# Altium PCB DE-120824.PcbDoc (part 1 of 2)
Units mil, origin at the board's own origin, x right, y up, seen from the top; angles counter-clockwise.
Board outline 2677.17 x 5787.4 mil, 4 copper layers (Top Layer, GND, PWR, Bottom Layer), stack 30.634 mil thick; 144 components, 186 nets, 562 pads, 68 vias.
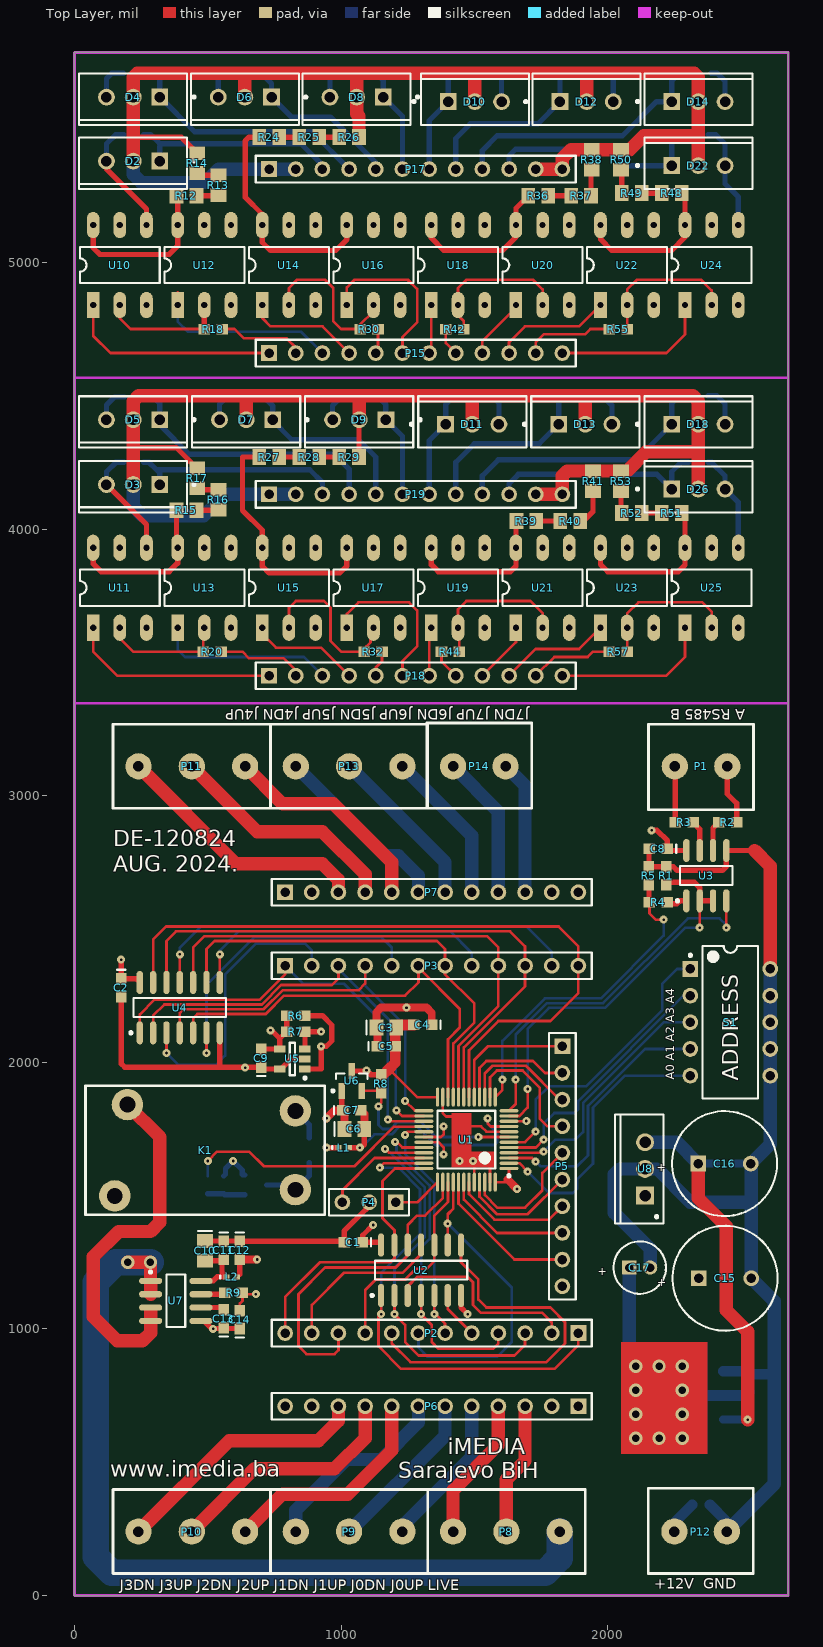
[diagram p0: Top Layer view]
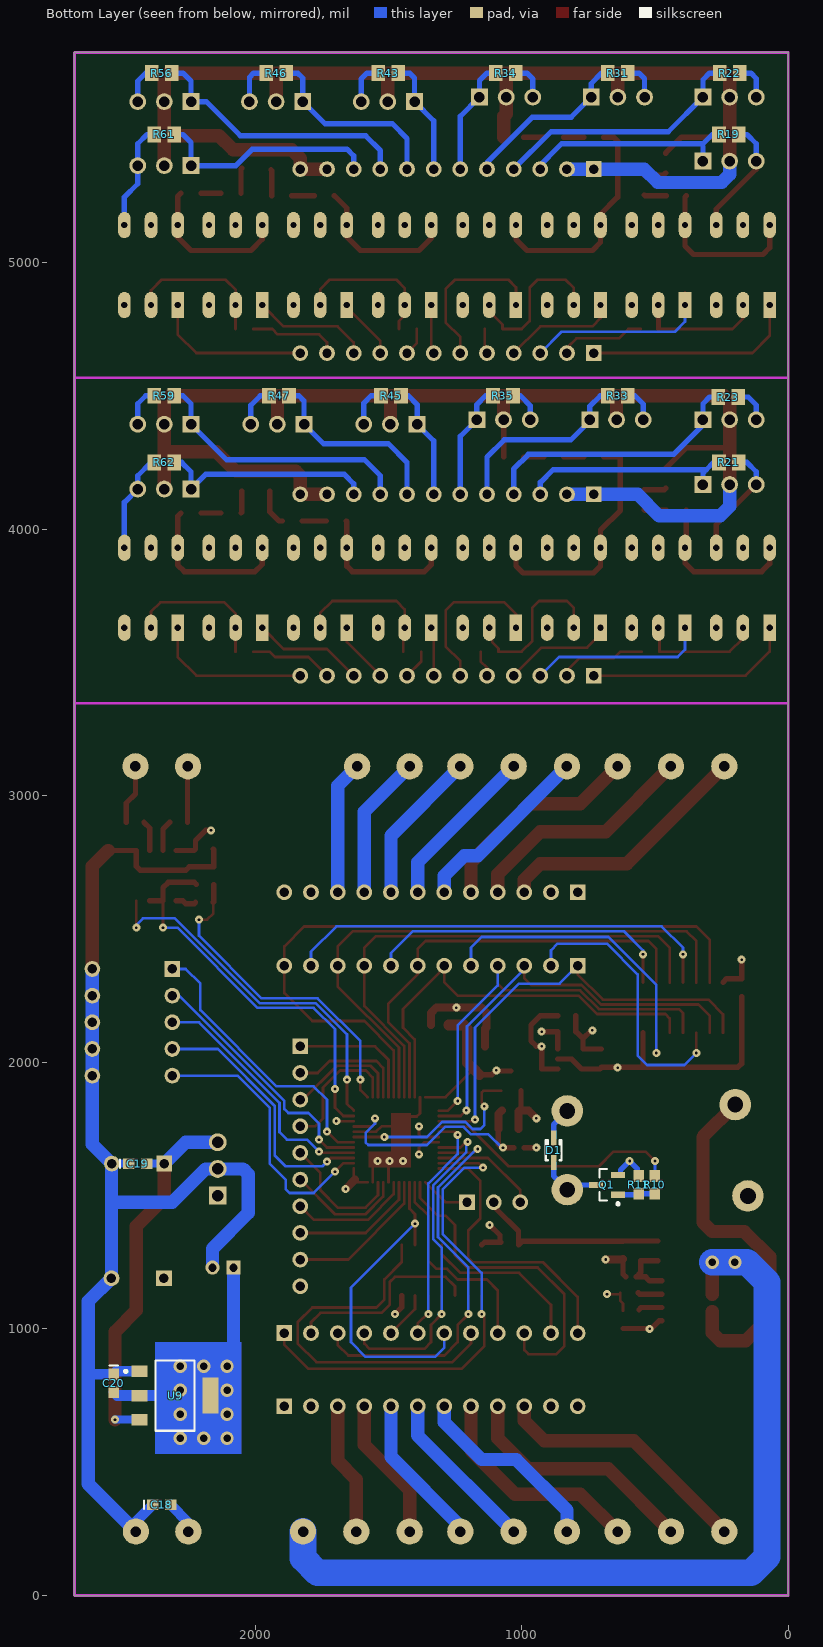
[diagram p1: Bottom Layer view, seen from below]
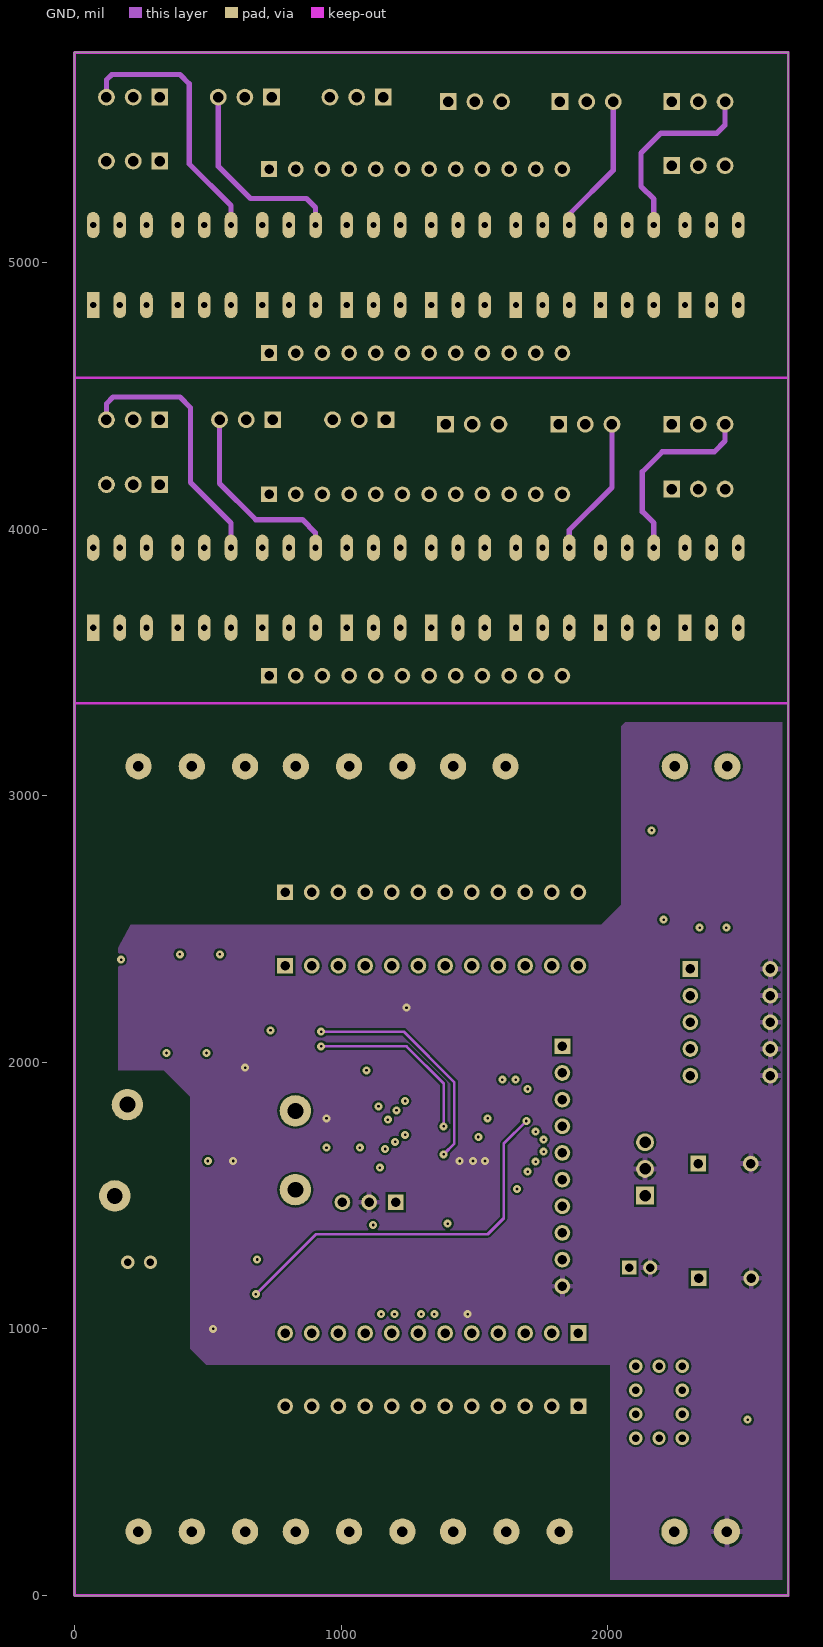
[diagram p2: GND]
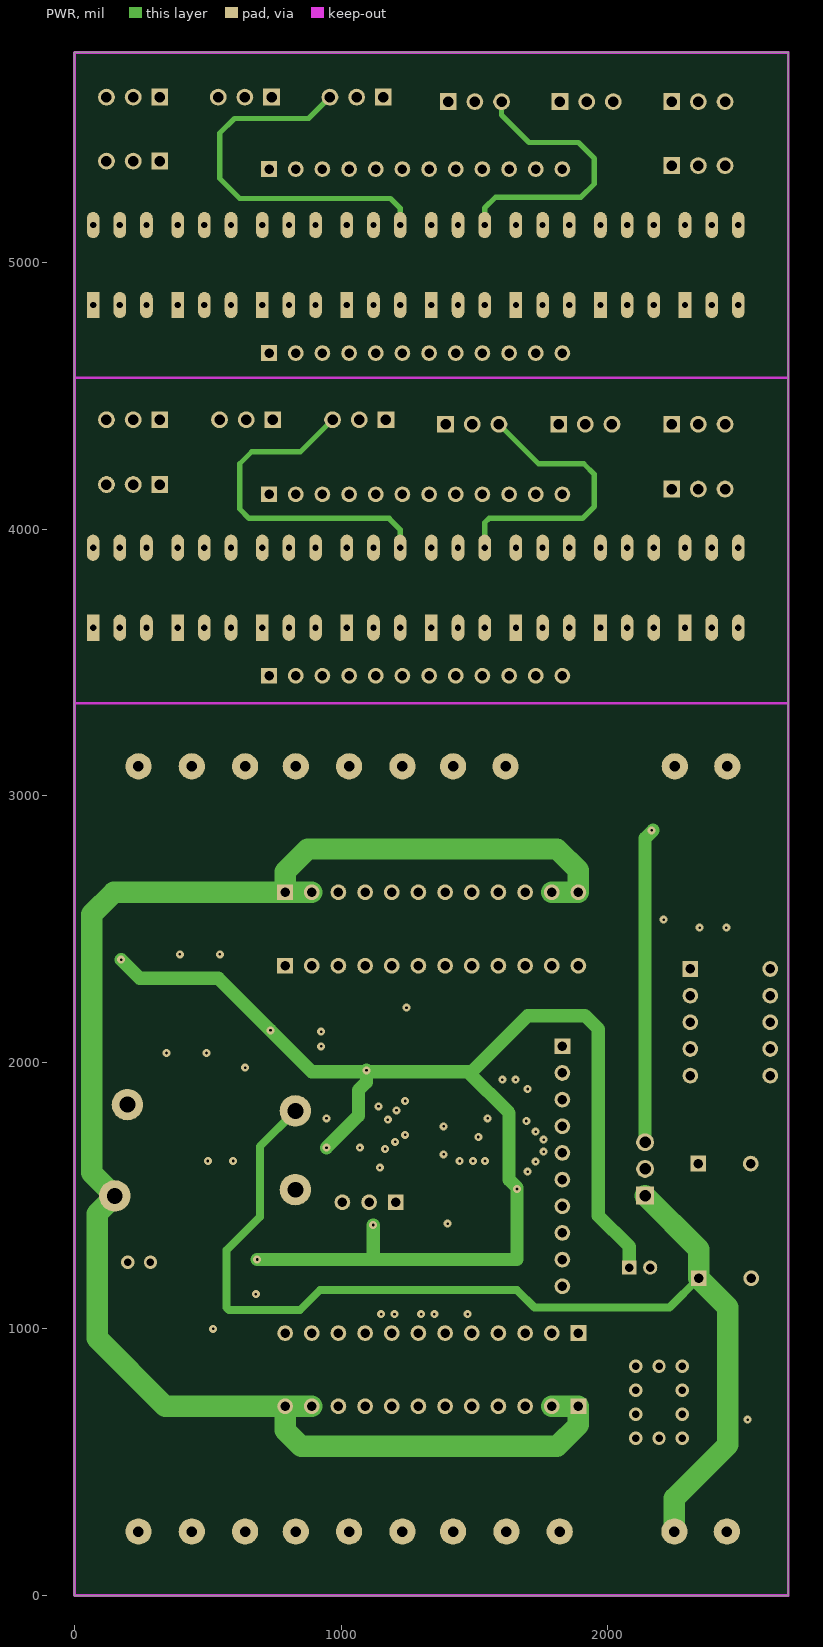
[diagram p3: PWR]

## Layer stack, top to bottom
Top Solder: solder mask 0.4, Solder Resist, Dk 3.5
Top Layer: signal copper 1.4
Dielectric 1: core 10, FR-4, Dk 4.2
GND: signal copper 1.417
Dielectric 3: prepreg 5, Dk 4.2
PWR: signal copper 1.417
Dielectric 2: core 10, Dk 4.2
Bottom Layer: signal copper 1.4
Bottom Solder: solder mask 0.4, Solder Resist, Dk 3.5

## Board outline
0,0 0,5787.4 2677.17,5787.4 2677.17,0

## Design rules (kind name [scope] priority, off if disabled: settings)
BoardOutlineClearance [All] p1: gap=11.81 ignorepadtopadclearanceinfootprint=FALSE except(15.75: Arc-SplitBarrior Arc-SplitContinuation Track-SplitBarrior Track-SplitContinuation SMDPad-SplitBarrior SMDPad-SplitContinuation THPad-SplitBarrior THPad-SplitContinuation Via-SplitBarrior Via-SplitContinuation Fill-SplitBarrior Fill-SplitContinuation Poly-SplitBarrior Poly-SplitContinuation Region-SplitBarrior Region-SplitContinuation Text-SplitBarrior Text-SplitContinuation)
Clearance "Clearance Different Nets" [All] p1: gap=7.87 ignorepadtopadclearanceinfootprint=FALSE except(3.5: Arc-Arc Arc-Track Arc-SMDPad Track-Track Track-SMDPad; 5: SMDPad-SMDPad SMDPad-Via THPad-Via Via-Via; 10: Arc-Via Arc-Text Track-Via Track-Text SMDPad-Text THPad-Text Via-Text Fill-Text Poly-Text Region-Text Text-Text; 19.68: THPad-THPad Via-Hole)
Clearance "Clearance Same Nets" [All] p2: gap=7.87 ignorepadtopadclearanceinfootprint=FALSE except(3.5: Arc-Arc Arc-Track Arc-SMDPad Track-Track Track-SMDPad SMDPad-SMDPad; 5: SMDPad-Via THPad-Via; 10: Arc-Via Arc-Text Track-Via Track-Text SMDPad-Text THPad-Text Via-Via Via-Text Fill-Text Poly-Text Region-Text Text-Text)
Clearance "Clearance Bottom Layer" [OnLayer('Bottom Layer')] p3: gap=8 ignorepadtopadclearanceinfootprint=TRUE except(10: Arc-Text Track-Text SMDPad-Text THPad-Text Via-Text Fill-Text Poly-Text Region-Text Text-Text)
Clearance "Clearance Top Layer" [OnLayer('Top Layer')] p4: gap=8 ignorepadtopadclearanceinfootprint=TRUE except(10: Arc-Text Track-Text SMDPad-Text THPad-Text Via-Text Fill-Text Poly-Text Region-Text Text-Text)
HoleSize [All] p1: absolutevalues=TRUE maxlimit=248.03 minlimit=7.87 maxpercent=80.000 minpercent=20.000
MinimumAnnularRing [All] p1: minimumring=5.12
MinimumSolderMaskSliver [All] p1: minsoldermaskwidth=3.94
PolygonConnect PolygonConnect_1 [All] p1: thpad.connectstyle=Relief thpad.reliefconductorwidth=20 thpad.reliefentries=4 thpad.polygonreliefangle="90 Angle" thpad.airgapwidth=10 smdpad.connectstyle=Relief smdpad.reliefconductorwidth=20 smdpad.reliefentries=4 smdpad.polygonreliefangle="90 Angle" smdpad.airgapwidth=10 via.connectstyle=Direct via.reliefconductorwidth=20 via.reliefentries=4 via.polygonreliefangle="90 Angle" via.airgapwidth=10
RoutingCorners [All] p1: cornerstyle=Round minsetback=100 maxsetback=100
RoutingVias [All] p1: holewidth=19.68 width=39.37 viastyle="Through Hole" minholewidth=7.87 minwidth=13.78 maxholewidth=39.37 maxwidth=78.74
SilkToSilkClearance [All] p1: silktosilkclearance=3.94
SilkToSolderMaskClearance [IsPad] p1: minsilkscreentomaskgap=3.94 clearancetoexposedcopper=TRUE
SolderMaskExpansion [All] p1: expansion=4 istentingtop=FALSE
Width [All] p1: maxlimit=100 minlimit=3.5 preferedwidth=15
25 further rules are at their usual default settings.

## Classes and differential pairs
component class DE-120824_01: D2 D3 D4 D5 D6 D7 D8 D9 D10 D11 D12 D13 D14 D18 D22 D26 P15 P17 P18 P19 R12 R13 R14 R15 R16 R17 R18 R19 R20 R21 R22 R23 R24 R25 R26 R27 R28 R29 R30 R31 R32 R33 R34 R35 R36 R37 R38 R39 R40 R41 R42 R43 R44 R45 R46 R47 R48 R49 R50 R51 R52 R53 R55 R56 R57 R59 R61 R62 U10 U11 U12 U13 U14 U15 U16 U17 U18 U19 U20 U21 U22 U23 U24 U25
component class DE-120824: C1 C2 C3 C4 C5 C6 C7 C8 C9 C10 C11 C12 C13 C14 C15 C16 C17 C18 C19 C20 D1 K1 L1 L2 P1 P2 P3 P4 P5 P6 P7 P8 P9 P10 P11 P12 P13 P14 Q1 R1 R2 R3 R4 R5 R6 R7 R8 R9 R10 R11 S1 U1 U2 U3 U4 U5 U6 U7 U8 U9

## Components (designator, comment, footprint, x,y, rotation, side; value= is the part's Value field where it differs from the comment)
C1 "C0603" 0603 1045,1325 r180 top value=100nF
C2 "C0603" 0603 175,2280 r270 top value=100nF
C3 "C0805" 0805 1170,2130 r0 top value=4u7
C4 "C0603" 0603 1306.54,2140 r180 top value=100nF
C5 "C0603" 0603 1170,2060 r0 top value=100nF
C6 "C0805" 0805 1050,1750 r0 top value=4u7
C7 "C0603" 0603 1040,1820 r0 top value=100nF
C8 "100nF" 0603 2190,2800 r180 top
C9 "C0603" 0603 700,2015 r90 top value=100nF
C10 "C0805" 0805 490,1292.4 r270 top value=4u7
C11 "C0603" 0603 560,1295 r270 top value=100nF
C12 "C0603" 0603 620,1295 r270 top value=100nF
C13 "C0603" 0603 560,1038.46 r90 top value=10nF
C14 "C0603" 0603 620,1035 r90 top value=100nF
C15 "470uF" CAPPR5-10X12.5 2440,1190 r0 top
C16 "470uF" CAPPR5-10X12.5 2438.43,1620 r0 top
C17 "22uF" CAPPR2-5X11 2120,1230 r0 top value=47uF
C18 "100nF" 0603 2350,340 r180 bottom
C19 "100nF" 0603 2440,1620 r180 bottom
C20 "100nF" 0603 2530,796.54 r270 bottom
D1 "1N4148" SOD323 880,1670 r90 bottom
D2 "BTA08-600" ONSC-TO-220-3-221A-07 220,5380 r270 top
D3 "BTA08-600" ONSC-TO-220-3-221A-07 220,4166.93 r270 top
D4 "BTA08-600" ONSC-TO-220-3-221A-07 220,5620 r270 top
D5 "BTA08-600" ONSC-TO-220-3-221A-07 220,4410 r270 top
D6 "BTA08-600" ONSC-TO-220-3-221A-07 639.08,5620 r270 top
D7 "BTA08-600" ONSC-TO-220-3-221A-07 644,4410 r270 top
D8 "BTA08-600" ONSC-TO-220-3-221A-07 1058.16,5620 r270 top
D9 "BTA08-600" ONSC-TO-220-3-221A-07 1068,4410 r270 top
D10 "BTA08-600" ONSC-TO-220-3-221A-07 1501.84,5603.07 r90 top
D11 "BTA08-600" ONSC-TO-220-3-221A-07 1492,4393.07 r90 top
D12 "BTA08-600" ONSC-TO-220-3-221A-07 1920.92,5603.07 r90 top
D13 "BTA08-600" ONSC-TO-220-3-221A-07 1916,4393.07 r90 top
D14 "BTA08-600" ONSC-TO-220-3-221A-07 2340,5603.07 r90 top
D18 "BTA08-600" ONSC-TO-220-3-221A-07 2340,4393.07 r90 top
D22 "BTA08-600" ONSC-TO-220-3-221A-07 2340,5363.07 r90 top
D26 "BTA08-600" ONSC-TO-220-3-221A-07 2340,4150 r90 top
K1 "HF25F" HF25F 490,1670 r180 top locked
L1 "BLM15AG121" 0402-A 1010,1680 r0 top
L2 "BLM15AG121" 0402-A 590,1195 r0 top
P1 "RS485" "TERMINAL BLOK 2" 2350,3110 r270 top locked
P2 "Header 12" HDR1X12 1890,984.25 r180 top
P3 "Header 12" HDR1X12 790,2362.2 r0 top
P4 "ICSP" HDR1X3 1205,1475 r180 top
P5 "Header 10" HDR1X10 1830,2060 r270 top
P6 "Header 12" HDR1X12 1890,710 r180 top
P7 "Header 12" HDR1X12 790,2637.8 r0 top
P8 "" "TERMINAL BLOK 3" 1620,240 r90 top locked
P9 "" "TERMINAL BLOK 3" 1030,240 r90 top locked
P10 "" "TERMINAL BLOK 3" 440,240 r90 top locked
P11 "" "TERMINAL BLOK 3" 440,3110 r270 top locked
P12 "DC_IN" "TERMINAL BLOK 2" 2348.43,240 r90 top locked
P13 "" "TERMINAL BLOK 3" 1030,3110 r270 top locked
P14 "" "TERMINAL BLOK 2" 1518.43,3110 r90 top locked
P15 "Header 12" HDR1X12 730,4660 r0 top
P17 "Header 12" HDR1X12 730,5350 r0 top
P18 "Header 12" HDR1X12 730,3450 r0 top
P19 "Header 12" HDR1X12 730,4130 r0 top
Q1 "BC817" SOT23_N 680,1540 r0 bottom
R1 "10K" ERA-0603 2220,2700 r270 top
R2 "10R" ERA-0603 2450,2900 r180 top
R3 "10R" ERA-0603 2286.54,2900 r0 top
R4 "1K2" ERA-0603 2190,2600 r0 top
R5 "2K2" ERA-0603 2154.57,2700 r90 top
R6 "2K2" ERA-0603 830,2175 r180 top
R7 "2K2" ERA-0603 830,2115 r180 top
R8 "10K" ERA-0603 1150,1920 r90 top
R9 "100R" ERA-0603 596.54,1135 r180 top
R10 "2K2" ERA-0603 500,1540 r90 bottom
R11 "100K" ERA-0603 560,1540 r270 bottom
R12 "120R" ERA-0805 420,5250 r0 top
R13 "120R" ERA-0805 540,5290 r90 top
R14 "120R" ERA-0805 460,5372.6 r90 top
R15 "120R" ERA-0805 420,4070 r0 top
R16 "120R" ERA-0805 540,4110 r90 top
R17 "120R" ERA-0805 460,4190 r90 top
R18 "180R" ERA-0603 520,4750 r180 top
R19 "330R" ERA-0805 222.6,5480 r0 bottom
R20 "180R" ERA-0603 516.54,3540 r180 top
R21 "330R" ERA-0805 222.6,4250 r0 bottom
R22 "330R" ERA-0805 220,5710 r0 bottom
R23 "330R" ERA-0805 225,4495 r0 bottom
R24 "120R" ERA-0805 730,5470 r0 top
R25 "120R" ERA-0805 880,5470 r0 top
R26 "120R" ERA-0805 1030,5470 r0 top
R27 "120R" ERA-0805 730,4270 r0 top
R28 "120R" ERA-0805 880,4270 r0 top
R29 "120R" ERA-0805 1030,4270 r0 top
R30 "180R" ERA-0603 1105,4750 r180 top
R31 "330R" ERA-0805 640,5710 r0 bottom
R32 "180R" ERA-0603 1120,3540 r180 top
R33 "330R" ERA-0805 640,4500 r0 bottom
R34 "330R" ERA-0805 1060,5710 r0 bottom
R35 "330R" ERA-0805 1070,4500 r0 bottom
R36 "120R" ERA-0805 1740,5250 r0 top
R37 "120R" ERA-0805 1900,5250 r0 top
R38 "120R" ERA-0805 1940,5385 r90 top
R39 "120R" ERA-0805 1695,4030 r0 top
R40 "120R" ERA-0805 1860,4030 r0 top
R41 "120R" ERA-0805 1945,4180 r90 top
R42 "180R" ERA-0603 1426.54,4750 r0 top
R43 "330R" ERA-0805 1500,5710 r180 bottom
R44 "180R" ERA-0603 1410,3540 r0 top
R45 "330R" ERA-0805 1490,4500 r180 bottom
R46 "330R" ERA-0805 1920,5710 r180 bottom
R47 "330R" ERA-0805 1910,4500 r180 bottom
R48 "120R" ERA-0805 2240,5260 r180 top
R49 "120R" ERA-0805 2090,5260 r180 top
R50 "120R" ERA-0805 2050,5385 r90 top
R51 "120R" ERA-0805 2240,4060 r180 top
R52 "120R" ERA-0805 2090,4060 r180 top
R53 "120R" ERA-0805 2050,4180 r90 top
R55 "180R" ERA-0603 2040,4750 r0 top
R56 "330R" ERA-0805 2350,5710 r180 bottom
R57 "180R" ERA-0603 2040,3540 r0 top
R59 "330R" ERA-0805 2340,4500 r180 bottom
R61 "330R" ERA-0805 2340,5480 r180 bottom
R62 "330R" ERA-0805 2340,4250 r180 bottom
S1 "SW DIP-5" N10A 2460,2150 r0 top
U1 "STM32F030C6T6" STM-LQFP48_N 1470,1710 r180 top
U2 "SN74HC08D" D014_N 1300,1220 r90 top
U3 "SN75176BD" D008_N 2370,2700 r90 top
U4 "SN74HC08D" D014_N 395,2205 r90 top
U5 "24AA01T-I/OT" SOT-23-OT5_N 817.24,2012.4 r180 top
U6 "TLV803MDBZR" DBZ3_N 1040,1930 r90 top
U7 "MCS1802GS-10-Z" SOIC-SN8_N 380,1105 r0 top
U8 "L7805CV" TO220 2140,1600 r90 top
U9 "REG1117-3.3" ZZ311 2300,750 r270 bottom
U10 "MOC3081" DIP6 70,4840 r90 top
U11 "MOC3081" DIP6 70,3630 r90 top
U12 "MOC3081" DIP6 387.14,4840 r90 top
U13 "MOC3081" DIP6 387.14,3630 r90 top
U14 "MOC3081" DIP6 704.29,4840 r90 top
U15 "MOC3081" DIP6 704.29,3630 r90 top
U16 "MOC3081" DIP6 1021.43,4840 r90 top
U17 "MOC3081" DIP6 1021.43,3630 r90 top
U18 "MOC3081" DIP6 1338.57,4840 r90 top
U19 "MOC3081" DIP6 1338.57,3630 r90 top
U20 "MOC3081" DIP6 1655.71,4840 r90 top
U21 "MOC3081" DIP6 1655.71,3630 r90 top
U22 "MOC3081" DIP6 1972.86,4840 r90 top
U23 "MOC3081" DIP6 1972.86,3630 r90 top
U24 "MOC3081" DIP6 2290,4840 r90 top
U25 "MOC3081" DIP6 2290,3630 r90 top

## Footprints (in the part's own frame and the unit in brackets; to place one, negate y for a bottom-side part, rotate by r counter-clockwise, add the part's x,y. Pads: shape width x height; smd on the part's side, far side on the other; paste and mask are expansions set on the pad)
0402-A [mm] "Chip Inductor, Body 1.0x0.5mm, IPC High Density"
  rect 0.6x0.5 smd: 1(-0.5,0) 2(0.5,0)
  silkscreen extent -1.1,-0.15 -1.1,0.15, body extent -0.55,-0.3 0.55,0.3, height 0.55
0603 [mm] "Chip Capacitor; Body 1.6 x 0.8 mm (LxW typ)"
  rect 1.1x1 smd: 1(-0.85,0) 2(0.85,0)
  silkscreen extent -1.7,-0.4 -1.7,0.4
0805 [mm] "Chip Capacitor; Body 2.0 x 1.2 mm (LxW typ)"
  rect 1.3x1.5 smd: 1(-0.95,0) 2(0.95,0)
  silkscreen extent -1.9,-0.65 -1.9,0.65
CAPPR2-5X11 [mm] "Capacitor, Electrolytic, Radial; Body 5 x 11 mm (Dia.xH typ); Pin Spacing 2 mm (typ)"
  rect 1.35x1.35 hole 0.8: 1(-1,0)
  round 1.35 hole 0.8: 2(1,0)
  silkscreen extent -2.5,-2.5 2.5,2.5
CAPPR5-10X12.5 [mm] "Capacitor, Electrolytic, Radial; Body 10 x 12.5 mm (Dia.xH typ); Pin Spacing 5 mm (typ)"
  rect 1.5x1.5 hole 0.9: 1(-2.5,0)
  round 1.5 hole 0.9: 2(2.5,0)
  silkscreen extent -5,-5 5,5, body extent -5,-5 5,5, height 12.5
D008_N [mm] "SOIC, 8-Leads, Body 4.9x3.9mm, Pitch 1.27mm, IPC Medium Density"
  oval 2.2x0.6 smd: 1(-2.4,1.905) 2(-2.4,0.635) 3(-2.4,-0.635) 4(-2.4,-1.905) 5(2.4,-1.905) 6(2.4,-0.635) 7(2.4,0.635) 8(2.4,1.905)
  silkscreen extent -2.52,-2.5 0.9,2.88, body extent -1.95,-2.45 1.95,2.45, height 1.75
D014_N [mm] "SOIC, 14-Leads, Body 8.7x3.9mm, Pitch 1.27mm, IPC Medium Density"
  oval 2.2x0.6 smd: 1(-2.4,3.81) 2(-2.4,2.54) 3(-2.4,1.27) 4(-2.4,0) 5(-2.4,-1.27) 6(-2.4,-2.54) 7(-2.4,-3.81) 8(2.4,-3.81) 9(2.4,-2.54) 10(2.4,-1.27) 11(2.4,0) 12(2.4,1.27) 13(2.4,2.54) 14(2.4,3.81)
  silkscreen extent -2.52,-4.4 0.9,4.78, body extent -1.95,-4.33 1.95,4.33, height 1.75
DBZ3_N [mm] "SOT23, 3-Leads, Body 2.9x1.3mm, Pitch 0.95mm, Lead Span 2.4mm, IPC Medium Density"
  rect 1.5x0.6 smd: 1(-0.95,0.95) 2(-0.95,-0.95) 3(0.95,0)
  silkscreen extent -1.07,-1.5 0.7,1.92, body extent -0.7,-1.52 0.7,1.52, height 1.12
DIP6 [mm]
  rect 2.5x1.2 hole 0.6: 1(0,0)
  oval 2.5x1.2 hole 0.6: 2(0,-2.54) 3(0,-5.08) 4(7.62,-5.08) 5(7.62,-2.54) 6(7.62,0)
  silkscreen extent 2.08,-6.35 5.54,1.27, body extent 0.63,-6.48 6.98,1.27, height 1
ERA-0603 [mm] "Chip Resistor; Body 1.6 x 0.8 mm (LxW typ)"
  rect 1.1x1 smd: 1(-0.85,0) 2(0.85,0)
ERA-0805 [mm] "Chip Resistor; Body 2 x 1.3 mm (LxW typ)"
  rect 1.3x1.5 smd: 1(-0.95,0) 2(0.95,0)
HDR1X3 [mm] "Connector; Header; 3 Position"
  rect 1.5x1.5 hole 0.9: 1(0,0)
  round 1.5 hole 0.9: 2(2.54,0) 3(5.08,0)
  silkscreen extent -1.27,-1.27 6.35,1.27
HDR1X10 [mm] "Connector; Header; 10 Position"
  rect 1.5x1.5 hole 0.9: 1(0,0)
  round 1.5 hole 0.9: 2(2.54,0) 3(5.08,0) 4(7.62,0) 5(10.16,0) 6(12.7,0) 7(15.24,0) 8(17.78,0) 9(20.32,0) 10(22.86,0)
  silkscreen extent -1.27,-1.27 24.13,1.27
HDR1X12 [mm] "Connector; Header; 12 Position"
  rect 1.5x1.5 hole 0.9: 1(0,0)
  round 1.5 hole 0.9: 2(2.54,0) 3(5.08,0) 4(7.62,0) 5(10.16,0) 6(12.7,0) 7(15.24,0) 8(17.78,0) 9(20.32,0) 10(22.86,0) 11(25.4,0) 12(27.94,0)
  silkscreen extent -1.27,-1.27 29.21,1.27
HF25F [mm] "PCB relay 20A/250VAC 16A/30VDC"
  round 3 hole 1.5: 1(-8.6,3.75) 2(-8.6,-3.75) 3(8.6,4.35) 4(7.4,-4.35)
  silkscreen extent -11.4,-6.15 11.4,6.15, body extent -11.43,-6.1 11.43,6.1, height 25
N10A [mm] "DIP; 10 Leads; Row Spacing 7.62 mm; Pitch 2.54 mm"
  rect 1.5x1.5 hole 0.9: 1(-3.81,5.08)
  round 1.5 hole 0.9: 2(-3.81,2.54) 3(-3.81,0) 4(-3.81,-2.54) 5(-3.81,-5.08) 6(3.81,-5.08) 7(3.81,-2.54) 8(3.81,0) 9(3.81,2.54) 10(3.81,5.08)
  silkscreen extent -3.93,-7.25 2.65,7.25, body extent -3.25,-7.25 3.25,7.25, height 5.08
ONSC-TO-220-3-221A-07 [mm] "FM, 3-Leads, Body 10.3x4.85mm, Pitch 2.54mm"
  rect 1.6x1.6 hole 1: 1(0,2.54)
  round 1.6 hole 1: 2(0,0) 3(0,-2.54)
  silkscreen extent -2.23,-5.15 2.67,5.93, body extent -2.21,-5.15 2.64,5.15, height 19.68
SOD323 [mm] "SOD-323/SC-76; 2 Leads; Body 1.7 x 1.3 mm, (LxW)"
  rect 1.45x0.55 smd: 1(1.175,0) 2(-1.175,0)
  silkscreen extent -0.95,-0.75 0.95,0.75
SOIC-SN8_N [mm] "SOIC, 8-Leads, Body 4.9x3.8mm, Pitch 1.27mm, IPC Medium Density"
  oval 2.2x0.6 smd: 1(-2.4,1.905) 2(-2.4,0.635) 3(-2.4,-0.635) 4(-2.4,-1.905) 5(2.4,-1.905) 6(2.4,-0.635) 7(2.4,0.635) 8(2.4,1.905)
  silkscreen extent -2.52,-2.5 0.9,2.88, body extent -2,-2.5 2,2.5, height 1.75
SOT23_N [mm] "SOT23, 3-Leads, Body 2.9x1.3mm, Pitch 0.95mm, Lead Span 2.3mm, IPC Medium Density"
  rect 1.3x0.6 smd: 1(-1.05,0.95) 2(-1.05,-0.95) 3(1.05,0)
  silkscreen extent -1.17,-1.5 0.7,1.92, body extent -0.7,-1.5 0.7,1.5, height 1.1
SOT-23-OT5_N [mm] "SOT23, 5-Leads, Body 2.9x1.6mm, Pitch 0.95mm, Lead Span 2.7mm, IPC Medium Density"
  rect 1.1x0.65 smd: 1(-1.2,0.95) 2(-1.2,0) 3(-1.2,-0.95) 4(1.2,-0.95) 5(1.2,0.95)
  silkscreen extent -1.33,-1.55 0.25,1.95, body extent -0.9,-1.55 0.9,1.55, height 1.45
STM-LQFP48_N [mm] "QFP, 48-Leads, Body 7x7mm, Pitch 0.5mm, IPC Medium Density"
  oval 1.8x0.3 smd: 1(-4.05,2.75) 2(-4.05,2.25) 3(-4.05,1.75) 4(-4.05,1.25) 5(-4.05,0.75) 6(-4.05,0.25) 7(-4.05,-0.25) 8(-4.05,-0.75) 9(-4.05,-1.25) 10(-4.05,-1.75) 11(-4.05,-2.25) 12(-4.05,-2.75) 25(4.05,-2.75) 26(4.05,-2.25) 27(4.05,-1.75) 28(4.05,-1.25) 29(4.05,-0.75) 30(4.05,-0.25) 31(4.05,0.25) 32(4.05,0.75) 33(4.05,1.25) 34(4.05,1.75) 35(4.05,2.25) 36(4.05,2.75)
  oval 0.3x1.8 smd: 13(-2.75,-4.05) 14(-2.25,-4.05) 15(-1.75,-4.05) 16(-1.25,-4.05) 17(-0.75,-4.05) 18(-0.25,-4.05) 19(0.25,-4.05) 20(0.75,-4.05) 21(1.25,-4.05) 22(1.75,-4.05) 23(2.25,-4.05) 24(2.75,-4.05) 37(2.75,4.05) 38(2.25,4.05) 39(1.75,4.05) 40(1.25,4.05) 41(0.75,4.05) 42(0.25,4.05) 43(-0.25,4.05) 44(-0.75,4.05) 45(-1.25,4.05) 46(-1.75,4.05) 47(-2.25,4.05) 48(-2.75,4.05)
  silkscreen extent -4.18,-2.75 2.75,3.57, body extent -3.5,-3.5 3.5,3.5, height 1.6
"TERMINAL BLOK 2" [mm] "Terminal blok 3,5mm"
  round 2.5 hole 1: 1(0,-2.5) 2(0,2.5)
  silkscreen extent -4,-5 4.13,5
"TERMINAL BLOK 3" [mm] "Terminal blok konektor 3 pina"
  round 2.5 hole 1: 1(0,5.08) 2(0,0) 3(0,-5.08)
  silkscreen extent -4,-7.5 4,7.5
TO220 [mm] "TO, Thru-Hole, Vertical, Heatsink Mounted; 3 In-Line Leads; Pitch 2.54 mm"
  rect 1.7x1.7 hole 1.1: 1(-2.54,0)
  round 1.7 hole 1.1: 2(0,0) 3(2.54,0)
  silkscreen extent -5.2,-1.75 5.2,2.85, body extent -5.25,-1.8 5.25,2.9, height 19.7
ZZ311 [mm] "SOT-223/SC-73; 4 Leads; Body 6.7 x 7.3 mm, inc. leads (LxW max)"
  rect 1.1x1.55 smd: 1(-2.3,-3.375) 2(0,-3.375) 3(2.3,-3.375)
  rect 3.45x1.55 smd: 4(0,3.375)
  silkscreen extent -3.35,-4.83 3.35,1.85

## Part data
C1 C2 C3 C4 C5 C6 C7 C9 C10 C11 C12 C13 C14: "Ceramic Chip Capacitor - Standard", PackageDocument=Mar-2001, ComponentLink1Description="Manufacturer Link", ComponentLink1URL=http://www.kemet.com/, ComponentLink2Description=Datasheet, ComponentLink2URL=http://www.kemet.com/kemet/web/homepage/kechome.nsf/vapubfilesname/F3102TA.pdf/$file/F3102TA.pdf, DatasheetDocument=Mar-2001, LatestRevisionDate=19-Mar-2004, LatestRevisionNote="Silkscreen size reduced.", Note="Footprint corresponds to dimensions for bulk cassette packaging. This case size has tightened tolerances.", Published=17-Jul-2002, Publisher="Altium Limited"
  C1 C2 C4 C5 C7 C9 C11 C12 C13 C14: Code_IPC="1608 [0603]", Code_JEITA=0603, PackageReference=0603
  C3 C6 C10: Code_IPC=2012[0805], Code_JEITA=0805, PackageReference=0805
C8 C18 C19 C20: library part C0603, "Ceramic Chip Capacitor - Standard", PackageDocument=Mar-2001, Code_IPC="1608 [0603]", Code_JEITA=0603, ComponentLink1Description="Manufacturer Link", ComponentLink1URL=http://www.kemet.com/, ComponentLink2Description=Datasheet, ComponentLink2URL=http://www.kemet.com/kemet/web/homepage/kechome.nsf/vapubfilesname/F3102TA.pdf/$file/F3102TA.pdf, DatasheetDocument=Mar-2001, LatestRevisionDate=19-Mar-2004, LatestRevisionNote="Silkscreen size reduced.", Note="Footprint corresponds to dimensions for bulk cassette packaging. This case size has tightened tolerances.", PackageReference=0603, Published=17-Jul-2002, Publisher="Altium Limited"
C15 C16: library part EKA00DC347E00, "Aluminum Electrolytic Capacitor, Radial Style with Long Leads: 470uF, 25V", ComponentLink1Description="Manufacturer Link", ComponentLink1URL=http://www.vishay.com/, ComponentLink2Description=Datasheet, ComponentLink2URL=http://www.vishay.com/docs/25014/eka.pdf, DatasheetDocument=20-Feb-2001, DrillSize="Nominal, Rounded To The Nearest 0.1mm", Note="Refer to Manufacturer's Data Sheets for other lead formations", PackageReference=CAPPR5-10X12.5, Published=19-Mar-2004, Publisher="Altium Limited"
C17: library part EKA00AA247F00, "Aluminum Electrolytic Capacitor, Radial Style with Long Leads: 47uF, 35V", ComponentLink1Description="Manufacturer Link", ComponentLink1URL=http://www.vishay.com/, ComponentLink2Description=Datasheet, ComponentLink2URL=http://www.vishay.com/docs/25014/eka.pdf, DatasheetDocument=20-Feb-2001, DrillSize="Nominal, Rounded To The Nearest 0.1mm", Note="Refer to Manufacturer's Data Sheets for other lead formations", PackageReference=CAPPR2-5X11, Published=19-Mar-2004, Publisher="Altium Limited"
D1: library part 1PS76SB10, "Schottky Barrier Diode", ComponentLink1Description="Manufacturer Link", ComponentLink1URL=http://www.semiconductors.philips.com/, ComponentLink2Description=Datasheet, ComponentLink2URL=http://www.semiconductors.philips.com/acrobat/datasheets/1PS76SB10_2.pdf, DatasheetVersion=14-Oct-1996, LatestRevisionDate=19-Mar-2004, LatestRevisionNote="Silkscreen size reduced.", PackageDescription="SOD-323/SC-76; 2 Leads; Body 1.7 x 1.3 mm, (LxW)", PackageReference=SOD323, PackageVersion=May-1999, Published=17-Sep-2003, Publisher="Altium Limited"
D2 D3 D4 D5 D6 D7 D8 D9 D10 D11 D12 D13 D14 D18 D22 D26: library part BTA08-600BW3G, "Triacs, Silicon Bidirectional Thyristor, 3-Pin TO-220, Pb-Free, Tube", Manufacturer="On Semiconductor", Supplier Part Number 1=BTA08-600BW3G-ND, ComponentLink1Description="Manufacturer URL", ComponentLink1URL=http://www.onsemi.com/, ComponentLink2Description=Datasheet, ComponentLink2URL=http://www.onsemi.com/pub_link/Collateral/BTA08-600BW3-D.PDF, ComponentLink3Description="Package Specification", ComponentLink3URL=http://www.onsemi.com/pub_link/Collateral/221A-07.PDF, DatasheetVersion="Rev. 1", IGT Max (mA)=50, IT(RMS) Max (A)=8, ITSM Max (A)=90, Mounting Technology="Through Hole", PackageDescription="3-Pin Flange Mount, Vertical Straight Lead, Body 9.97 x 4.445 mm, Pitch 2.54 mm", PackageReference=TO-220-3-221A-07, PackageVersion="Rev. O, 07/2008", Packing=Tube, PartNumber=BTA08-600BW3G, RoHS=Pb-Free, Supplier 1=Digi-Key, Supplier 2=Newark, Supplier 3=Mouser, Supplier Part Number 2=13P2072, Supplier Part Number 3=863-BTA08-600BW3G
K1: "PCB relay 250VAC/20A 30VDC/16A"
L1 L2: library part "Chip inductor", "SMD chip inductor", Code_IEC=1005, Code_JEITA=0402, LatestRevisionDate=29-May-2009, LatestRevisionNote="IPC-7351 Footprint Added.", PackageDescription="Chip Inductor", PackageReference=0402-A, Published=8-Jun-2000, Publisher="Altium Limited"
P1 P12 P14: library part "TERMINAL BLOK 2", "Terminal blok konektor 3,5 mm"
P2 P3 P6 P7 P15 P17 P18 P19: "Header, 12-Pin", LatestRevisionDate=17-Jul-2002, LatestRevisionNote="Re-released for DXP Platform.", Publisher="Altium Limited"
P4: library part "Header 3", "Header, 3-Pin", LatestRevisionDate=17-Jul-2002, LatestRevisionNote="Re-released for DXP Platform.", Publisher="Altium Limited"
P5: "Header, 10-Pin", LatestRevisionDate=17-Jul-2002, LatestRevisionNote="Re-released for DXP Platform.", Publisher="Altium Limited"
P8 P9 P10 P11 P13: library part "TERMINAL BLOK 3", "3 pinski terminal blok konektor"
Q1: "NPN General-purpose Transistor", ComponentLink1Description="Manufacturer Link", ComponentLink1URL=http://www.semiconductors.philips.com/, ComponentLink2Description=Datasheet, ComponentLink2URL=http://www.semiconductors.philips.com/acrobat/datasheets/BC817_BC817W_BC337_5.pdf, DatasheetVersion=Jun-1999, LatestRevisionDate=12-Dec-2006, LatestRevisionNote="IPC-7351 Footprint Added.", PackageDescription="3-Pin SOT-23 Package 0.95 mm Pitch, 2.3 mm Lead Span", PackageReference=SOT23, PackageVersion=May-1999, Published=17-Sep-2003, Publisher="Altium Limited"
R1 R2 R3 R4 R5 R9 R10 R11: library part ERAV, "Metal Film Thermosensitive Chip Resistor, 0.56 Ohm to 10k Ohm Range, 5% Tolerance, 0603 Size, 0.063 W", PackageDocument=Mar-2003, Code_IPC="1608 [0603]", ComponentLink1Description="Manufacturer Link", ComponentLink1URL=http://www.panasonic.com/industrial/components/resistive_products.htm, ComponentLink2Description=Datasheet, ComponentLink2URL=http://www.panasonic.com/industrial/components/pdf/AOF0000CE1.pdf, LatestRevisionDate=19-Mar-2004, LatestRevisionNote="Silkscreen size reduced.", Note="If flow soldering, adjust pad width of PCB Footprint to 0.7 - 0.8 times the width of the resistor.", PackageReference=ERA-0603, Published=17-Dec-2003, Publisher="Altium Limited"
R6 R7 R8 R18 R20 R30 R32 R42 R44 R55 R57: library part ERA3Y, "Rectangular Thick Film Chip Resistor, 10 Ohm to 330k Ohm Range, 0.1% and 0.5% Tolerance, 0603 Size, 0.063 W", PackageDocument=Mar-2003, Code_IPC="1608 [0603]", ComponentLink1Description="Manufacturer Link", ComponentLink1URL=http://www.panasonic.com/industrial/components/resistive_products.htm, ComponentLink2Description=Datasheet, ComponentLink2URL=http://www.panasonic.com/industrial/components/pdf/AOA0000CE8.pdf, LatestRevisionDate=19-Mar-2004, LatestRevisionNote="Silkscreen size reduced.", Note="If flow soldering, adjust pad width of PCB Footprint to 0.7 - 0.8 times the width of the resistor.", PackageReference=ERA-0603, Published=17-Dec-2003, Publisher="Altium Limited"
R12 R13 R14 R15 R16 R17 R19 R21 R22 R23 R24 R25 R26 R27 R28 R29 R31 R33 R34 R35 R36 R37 R38 R39 R40 R41 R43 R45 R46 R47 R48 R49 R50 R51 R52 R53 R56 R59 R61 R62: library part ERAS, "Metal Film Thermosensitive Chip Resistor, 0.56 Ohm to 10k Ohm Range, 5% Tolerance, 0805 Size, 0.1 W", PackageDocument=Mar-2003, Code_IPC="2012 [0805]", ComponentLink1Description="Manufacturer Link", ComponentLink1URL=http://www.panasonic.com/industrial/components/resistive_products.htm, ComponentLink2Description=Datasheet, ComponentLink2URL=http://www.panasonic.com/industrial/components/pdf/AOF0000CE1.pdf, LatestRevisionDate=19-Mar-2004, LatestRevisionNote="Silkscreen size reduced.", Note="If flow soldering, adjust pad width of PCB Footprint to 0.7 - 0.8 times the width of the resistor.", PackageReference=ERA-0805, Published=17-Dec-2003, Publisher="Altium Limited"
S1: "DIP Switch, 5 Position, SPST", LatestRevisionDate=17-Jul-2002, LatestRevisionNote="Re-released for DXP Platform.", PackageReference=N10A, Published=24-Mar-1999, Publisher="Altium Limited"
U1: "ARM Cortex-M0 32-bit MCU, 32 KB Flash, 4 KB Internal RAM, 39 I/Os, 48-pin LQFP, -40 to 85 degC, Tray", I/Os (High Current)=39, Operating Frequency(F) (Processor speed) (MHz)=48, Supplier Part Number 1=497-14042-ND, Supply Voltage(Vcc) min (V)=2.4, ComponentLink1Description="Manufacturer URL", ComponentLink1URL=http://www.st.com/web/en/home.html, ComponentLink2Description=Datasheet, ComponentLink2URL=http://www.st.com/st-web-ui/static/active/en/resource/technical/document/datasheet/DM00088500.pdf, ComponentLink3Description="Package Specification", ComponentLink3URL=http://www.st.com/st-web-ui/static/active/en/resource/technical/document/datasheet/DM00058181.pdf, Core="ARM Cortex-M0", DatasheetVersion="Rev. 1", FLASH Size (Prog) (kB)=32, Internal RAM Size (kB)=4, Mounting Technology="Surface Mount", PackageDescription="48-Pin Low Profile Quad Flat Package, 7 x 7 mm Body, 0.5 mm Pitch", PackageReference=LQFP48, PackageVersion="Rev. 6, 06/2013", Packing=Tray, PartNumber=STM32F030C6T6, Supplier 1=Digi-Key, Supplier 2=Newark, Supplier 3=Mouser, Supplier Part Number 2=06X3646, Supplier Part Number 3=511-STM32F030C6T6
U2 U4: "Quadruple 2-Input Positive-AND Gate", Code_IPC=SOIC127P600-14, ComponentLink1Description="Manufacturer Link", ComponentLink1URL=http://www.ti.com/, ComponentLink2Description=Datasheet, ComponentLink2URL=http://www-s.ti.com/sc/ds/SN74HC08.pdf, DatasheetVersion=May-1997, LatestRevisionDate=13-Apr-2006, LatestRevisionNote="IPC-7351 Footprint Added.", PackageDescription="14-Pin Small Outline Integrated Circuit 1.27 mm Pitch", PackageReference=D014, PackageVersion=Jan-1998, Published=8-Jun-2000, Publisher="Altium Limited"
U3: "Differential Bus Transceiver", Code_IPC=SOIC127P600-8, ComponentLink1Description="Manufacturer Link", ComponentLink1URL=http://www.ti.com/, ComponentLink2Description=Datasheet, ComponentLink2URL=http://www-s.ti.com/sc/ds/sn75176b.pdf, DatasheetVersion=Sep-1989, LatestRevisionDate=13-Apr-2006, LatestRevisionNote="IPC-7351 Footprint Added.", Note="Receiver Hysteresis of 50mV Typical", PackageDescription="8-Pin Small Outline Integrated Circuit 1.27 mm Pitch", PackageReference=D008, PackageVersion=Jan-1998, Published=15-May-2002, Publisher="Altium Limited"
U5: "1Kbit, 400kHz, 1.8V, I2C Serial EEPROM, 5-Pin SOT-23, Industrial Temperature, Tape and Reel", Supplier Part Number 1=24AA01T-I/OTTR-ND, Code_IPC=SOT23-5, ComponentLink1Description=Datasheet, ComponentLink1URL=http://ww1.microchip.com/downloads/en/DeviceDoc/21711J.pdf, ComponentLink2Description="Packaging Specification", ComponentLink2URL=http://www.microchip.com/stellent/groups/techpub_sg/documents/packagingspec/en012702.pdf, ComponentLink3Description="Microchip.com Home", ComponentLink3URL=http://www.microchip.com/, DatasheetVersion="revJ, Jan-2009", PackageDescription="5-Lead Plastic Small Outline Transistor (OT) [SOT-23]", PackageReference=SOT-23-OT5, PackageVersion="revBB, Aug-2009", Published=29-Jan-2009, Publisher="Altium Limited", Supplier 1=Digi-Key, Supplier 2=Digi-Key, Supplier 3=Digi-Key, Supplier 4=Farnell, Supplier Part Number 2=24AA01T-I/OTCT-ND, Supplier Part Number 3=24AA01T-I/OTDKR-ND, Supplier Part Number 4=1331269
U6: "Voltage Supervisor with Active-Low, Open Drain Reset, 1 Supply Monitored, -40 to 125 degC, 3-pin SOT-23 (DBZ), Green (RoHS & no Sb/Br)", Manufacturer="Texas Instruments", Rating=Catalog, Supplier Part Number 1=296-29194-2-ND, Threshold Voltage 1 (typ)(Typ)(V)=4.38, # of supplies monitored=1, Code_JEDEC=TO-236-AB, ComponentLink1Description=Datasheet, ComponentLink1URL=http://www.ti.com/general/docs/lit/getliterature.tsp?genericPartNumber=TLV803M&fileType=pdf, DatasheetVersion=SBVS157B, Iq(Typ)(uA)=9, Mounting Technology="Surface Mount", Output Driver Type / Reset Output="Active-low, Open-drain", PackageDescription="3-Pin Plastic Small-Outline Package, 0.95 mm Pitch, 2.4 mm Lead Span", PackageReference=DBZ3, PackageVersion="revB, Apr-2005", PartNumber=TLV803MDBZR, Reset Threshold Accuracy(%)=2, SubFamily="Supervisor and Reset IC", Supplier 1=Digi-Key, Supplier 2=Digi-Key, Supplier 3=Digi-Key, Supplier 4=Newark, Supplier 5=Mouser, Supplier Part Number 2=296-29194-1-ND, Supplier Part Number 3=296-29194-6-ND, Supplier Part Number 4=58T0286, Supplier Part Number 5=595-TLV803MDBZR, Time Delay(ms)=200, VCC(Max)(V)=6, VCC(Min)(V)=1.1
U7: library part ACS71240
U8: "Positive Voltage Regulator, 5V, 3-Pin TO-220", ComponentLink1Description="Manufacturer URL", ComponentLink1URL=http://www.st.com, ComponentLink2Description=Datasheet, ComponentLink2URL=http://www.st.com/internet/com/TECHNICAL_RESOURCES/TECHNICAL_LITERATURE/DATASHEET/CD00000444.pdf, ComponentLink3Description="Package Specification", ComponentLink3URL=http://www.st.com/internet/com/TECHNICAL_RESOURCES/TECHNICAL_LITERATURE/PACKAGE_INFORMATION/CD00004649.pdf, DatasheetVersion=Nov-2011, PackageDescription="TO, Thru-Hole, Vertical, Heatsink Mounted; 3 In-Line Leads; Pitch 2.54 mm", PackageReference=TO220, PackageVersion=ver3.0, PartNumber=L7805CV
U9: "800mA and 1A Low Dropout Positive Regulator 2.85V, 3.3V, 5V, and Adjustable", ComponentLink1Description="Manufacturer Link", ComponentLink1URL=http://www.ti.com/, ComponentLink2Description=Datasheet, ComponentLink2URL=http://www-s.ti.com/sc/ds/REG1117.pdf, DatasheetVersion=Sep-1997, LatestRevisionDate=17-Jul-2002, LatestRevisionNote="Re-released for DXP Platform.", PackageDescription="SOT-223/SC-73; 4 Leads; Body 6.7 x 7.3 mm, inc. leads (LxW max)", PackageReference=ZZ311, PackageVersion=revC, Published=8-Jun-2000, Publisher="Altium Limited"
U10 U11 U12 U13 U14 U15 U16 U17 U18 U19 U20 U21 U22 U23 U24 U25: "Zero-Cross Optoisolator Triac Driver"

## Via types
v1: diameter 30, hole 10, Top Layer to Bottom Layer, 56 vias
v2: diameter 50, hole 28, Top Layer to Bottom Layer, 12 vias

## Nets (pads, with @x,y where several pads share a name; then routed paths per layer and width w, separated by ;. In a path a pad name is that pad's centre, name@x,y a point inside that pad or via, vN(x,y) a via of type N, cw(c..) or ccw(c..) an arc to the next point about the centre after c; other vN are vias at no path point)
3V3: C1.1 C2.1 C3.2 C4.2 C5.2 C9.2 C12.2 C17.1 C20.2 L1.1 L2.2 R6.2 R7.2 R8.2 U1.1 U1.24 U1.48 U2.14 U4.14 U5.4 U6.3 U9.2 U9.4 | length 7274.5
  Top Layer w10: C9.2@700,2048.46 C9.2@701.34,2049.8 ; 1180,1975 1285.55,1869.45 U1.24@1361.73,1869.45 ; U1.48@1578.27,1550.55 1615.55,1550.55 1625,1560 1629.45,1564.45 U1.1@1629.45,1601.73
  Top Layer w20: v1(175,2385) C2.1@175,2313.46 231.02,2313.46 U4.14@245,2299.49 ; L2.2@609.69,1195 620,1205.32 C12.2@620,1261.54 ; C9.2@701.34,2049.8 U5.4@770,2049.8 770,2088.46 ; v1(735,2120) 738.46,2120 770,2088.46 ; R6.2@796.54,2175 R7.2@796.54,2115 770,2088.46 ; v1(945,1680) L1.1@990.32,1680 ; U6.3@1040,1967.4 v1@1089.7,1967.4 ; v1(1095,1970) 1111.54,1953.46 R8.2@1150,1953.46 ; v1(1120,1390) 1081.3,1351.3 1081.3,1327.84 C1.1@1078.46,1325 1139.49,1325 U2.14@1150,1314.49
  Top Layer w30: C12.2@620,1261.54 621.54,1260 v1(685,1260) ; 1625,1560 v1(1660,1525)
  Top Layer w40: R8.2@1158.46,1953.46 1180,1975 1203.46,1998.46 C5.2@1203.46,2060 1203.46,2126.06 C3.2@1207.4,2130 1217.4,2140 C4.2@1273.07,2140
  PWR w50: v1(175,2385) 245,2315 540,2315 v1(735,2120) 890,1965 1090,1965 v1(1095,1970) ; v1(685,1260) 1120,1260 ; v1(945,1680) 1065,1800 1065,1895 1095,1925 v1(1095,1970) ; v1(1120,1390) 1120,1260 ; 1490,1965 1700,2175 1915,2175 1965,2125 1965,1425 2080.63,1309.37 C17.1@2080.63,1230 ; v1(1095,1970) 1100,1965 1475,1965 1630,1810 1630,1560 1660,1530 v1(1660,1525) 1660,1260 1120,1260
  Bottom Layer w40: 2320,750 U9.2@2432.87,750 2516.93,750 C20.2@2530,763.07
  Bottom Layer w50: 2075,905 2080.63,910.63 C17.1@2080.63,1230
  other v2: 2105,590 2192.5,590 2280,590 2105,680 2280,680 2105,770 2280,770 2105,860 2192.5,860 2280,860
5V: C8.1 C16.1 C19.2 U3.8 U8.3 U9.3 | length 2791.2
  Top Layer w20: v1(2165,2870) 2185,2870 2223.46,2831.54 C8.1@2223.46,2800 2228.98,2794.49 U3.8@2295,2794.49
  Top Layer w50: C16.1@2340,1620 2340,1490 2445,1385 2445,1070 2525,990 v1(2525,659.45)
  PWR w50: U8.3@2140,1700 2140,2840 v1@2170,2870
  Bottom Layer w30: C16.1@2340,1620 C19.2@2406.54,1620 ; U9.3@2432.87,659.45 v1(2525,659.45)
  Bottom Layer w50: U8.3@2140,1700 2260,1700 C16.1@2340,1620
12V: C15.1 C18.2 D1.1 K1.2 P12.2 U8.1 | length 4445.5
  PWR w30: K1.2@828.58,1817.64 695,1684.06 695,1420 570,1295 570,1080 580,1070 845,1070 920,1145 1660,1145 1725,1080 2231.57,1080 C15.1@2341.57,1190
  PWR w80: U8.1@2140,1500 2341.57,1298.43 C15.1@2341.57,1190 2450,1081.57 2450,565 2250,365 P12.2@2250,240
  Bottom Layer w20: K1.2@828.58,1817.64 880,1766.22 D1.1@880,1716.26
  Bottom Layer w40: P12.2@2250,240 2250,273.46 C18.2@2316.54,340
ADDRESS0: S1.5 U1.2 | length 1052.5
  Top Layer w10: U1.2@1629.45,1621.42 1668.58,1621.42 v1(1700,1590)
  Bottom Layer w10: v1(1700,1590) 1780,1510 1870,1510 1885,1525 1885,1560 1945,1620 1945,1830 2065,1950 S1.5@2310,1950
ADDRESS1: S1.4 U1.3 | length 984.3
  Top Layer w10: U1.3@1629.45,1641.1 1716.4,1641.1 v1(1730,1627.5)
  Bottom Layer w10: v1(1730,1627.5) 1747.5,1610 1885,1610 1926,1651 1926,1836.46 2139.54,2050 S1.4@2310,2050
ADDRESS2: S1.3 U1.4 | length 947.6
  Top Layer w10: U1.4@1629.45,1660.79 1755.79,1660.79 v1(1760,1665)
  Bottom Layer w10: v1(1760,1665) 1805,1710 1880,1710 1908,1738 1908,1848 2210,2150 S1.3@2310,2150
ADDRESS3: S1.2 U1.5 | length 969.4
  Top Layer w10: U1.5@1629.45,1680.47 1730.47,1680.47 v1(1760,1710)
  Bottom Layer w10: v1(1760,1710) 1760,1770 1800,1810 1875,1810 1890,1825 1890,1855.46 2284.54,2250 S1.2@2310,2250
ADDRESS4: S1.1 U1.6 | length 1078.1
  Top Layer w10: U1.6@1629.45,1700.16 1690.16,1700.16 v1(1730,1740)
  Bottom Layer w10: v1(1730,1740) 1730,1860 1780,1910 1919.09,1910 2205,2195.91 2205,2295 2260,2350 S1.1@2310,2350
BTN_DN: P5.3 U1.15 | length 444.8
  Top Layer w10: U1.15@1538.9,1869.45 1538.9,1958.9 1567,1987 1693,1987 1820,1860 P5.3@1830,1860
BTN_MOVE: P5.1 U1.17 | length 491.5
  Top Layer w10: U1.17@1499.53,1869.45 1499.53,2009.53 1550,2060 P5.1@1830,2060
BTN_UP: P5.2 U1.16 | length 449.9
  Top Layer w10: U1.16@1519.21,1869.45 1519.21,1979.21 1545,2005 1720,2005 1765,1960 P5.2@1830,1960
BTNDN: 
BTNMV: 
BTNUP: 
CURRENT: C14.2 R9.1 U1.10 | length 1637
  Top Layer w10: C14.2@620,1068.46 620,1095 630,1105 R9.1@630,1135 635,1130 v1(680,1130) ; U1.10@1629.45,1778.9 1693.9,1778.9 v1(1695,1780)
  GND w10: v1(680,1130) 905,1355 1550,1355 1610,1415 1610,1695 v1(1695,1780)
F: K1.3 P6.1 P6.2 P6.11 P6.12 P7.1 P7.2 P7.11 P7.12 | length 6269
  PWR w80: P6.11@890,710 P6.12@790,710 ; P7.2@890,2637.8 P7.1@790,2637.8 ; P6.2@1790,710 P6.1@1890,710 1890,640 1810,560 850,560 790,620 P6.12@790,710 ; P7.11@1790,2637.8 P7.12@1890,2637.8 1890,2720 1810,2800 875,2800 790,2715 P7.1@790,2637.8 ; P6.12@790,710 340,710 85,965 85,1432.32 K1.3@151.42,1498.74 65,1585.16 65,2555 147.8,2637.8 P7.1@790,2637.8
F1: D2.2 D4.2 D6.2 D8.2 D10.2 D12.2 D14.2 D22.2 P17.1 P17.2 P17.11 P17.12 R14.2 R26.2 R38.2 R50.2 | length 4962.7
  Top Layer w20: 240,5470 400,5470 R14.2@460,5410
  Top Layer w50: D2.2@220,5380 D4.2@220,5620 220,5695 235,5710 645,5710 ; D6.2@639.08,5620 639.08,5704.08 645,5710 ; R26.2@1067.4,5470 1067.4,5547.6 1058.16,5556.84 D8.2@1058.16,5620 1058.16,5696.84 1045,5710 ; D10.2@1501.84,5603.07 1501.84,5708.16 1500,5710 ; P17.11@1730,5350 P17.12@1830,5350 1830,5390 1862.4,5422.4 R38.2@1940,5422.4 R50.2@2050,5422.4 2082.4,5422.4 2135,5475 2340,5475 ; D12.2@1920.92,5603.07 1920.92,5700.92 1930,5710 ; D22.2@2340,5363.07 2340,5475 ; 645,5710 1045,5710 ; 1045,5710 1500,5710 ; 1500,5710 1930,5710 ; 1930,5710 2325,5710 2340,5695 D14.2@2340,5603.07 2340,5475
  Bottom Layer w50: D2.2@220,5380 220,5330 250,5300 490,5300 540,5350 P17.1@730,5350 P17.2@830,5350
F2: D3.2 D5.2 D7.2 D9.2 D11.2 D13.2 D18.2 D26.2 P19.1 P19.2 P19.11 P19.12 R17.2 R29.2 R41.2 R53.2 | length 5047.7
  Top Layer w20: 220,4305 382.4,4305 R17.2@460,4227.4 ; R29.2@1067.4,4270 1067.4,4409.4 D9.2@1068,4410
  Top Layer w50: D3.2@220,4166.93 220,4305 D5.2@220,4410 220,4480 240,4500 645,4500 ; D7.2@644,4410 644,4499 645,4500 ; D9.2@1068,4410 1068,4492 1060,4500 ; D11.2@1492,4393.07 1492,4498 1490,4500 ; P19.11@1730,4130 P19.12@1830,4130 1830,4200 1847.4,4217.4 R41.2@1945,4217.4 R53.2@2050,4217.4 2072.4,4217.4 2145,4290 2340,4290 ; D13.2@1916,4393.07 1916,4499 1915,4500 ; D26.2@2340,4150 2340,4290 ; 645,4500 1060,4500 ; 1060,4500 1490,4500 ; 1490,4500 1915,4500 ; 1915,4500 2320,4500 2340,4480 D18.2@2340,4393.07 2340,4290
  Bottom Layer w50: D3.2@220,4166.93 220,4085 255,4050 485,4050 565,4130 P19.1@730,4130 P19.2@830,4130
GND: C1.2 C2.2 C3.1 C4.1 C5.1 C6.1 C7.1 C8.2 C9.1 C10.1 C11.1 C12.1 C13.1 C14.1 C15.2 C16.2 C17.2 C18.1 C19.1 C20.1 P4.2 P5.10 P12.1 Q1.2 R1.1 R5.2 R11.1 S1.6 S1.7 S1.8 S1.9 S1.10 U1.8 U1.23 U1.44 U1.47 U2.7 U3.5 U4.7 U5.2 U5.5 U6.1 U7.5 U8.2 U9.1 | length 7954.5
  Top Layer w10: U1.23@1381.42,1869.45 1381.42,1808.58 1393.56,1796.44 1417.85,1796.44 ; 1430,1760 1525,1760 1545.47,1739.53 U1.8@1629.45,1739.53 ; U1.44@1499.53,1550.55 1499.53,1619.53 1510,1630 v1(1540,1630) 1545,1630 1558.58,1616.42 U1.47@1558.58,1550.55
  Top Layer w20: C2.2@175,2246.54 175,1995 188.46,1981.54 548.46,1981.54 ; U7.5@474.49,1030 485,1030 513.46,1001.54 C14.1@620,1001.54 ; C10.1@490,1329.8 618.66,1329.8 C12.1@620,1328.46 998.07,1328.46 C1.2@1011.54,1315 ; U4.7@545,2110.51 545,1985 548.46,1981.54 ; U5.2@864.49,2012.4 812.4,2012.4 775,1975 U5.5@770,1975 706.54,1975 C9.1@700,1981.54 548.46,1981.54 ; U6.1@1002.6,1892.6 1002.6,1823.94 C7.1@1006.54,1820 ; C1.2@1011.54,1325 1011.54,1366.54 1093.82,1448.82 1093.82,1453.26 1105,1464.43 P4.2@1105,1475 ; U2.7@1450,1125.51 1450,1080 v1(1475,1055) ; C8.2@2156.54,2800 2154.57,2798.03 R5.2@2154.57,2733.46 2246.54,2733.46 2260,2720 2430,2720 2445,2735 U3.5@2445,2794.49 2550.51,2794.49
  Top Layer w30: v1(945,1790) 975,1820 C7.1@1006.54,1820 1007.91,1820 1012.6,1815.31 C6.1@1012.6,1750 ; C5.1@1136.54,2060 1136.54,2126.06 C3.1@1132.6,2130 1132.6,2187.6 1150,2205 v1(1245,2205) 1320,2205 1340,2185 C4.1@1340,2140
  Top Layer w50: 2550.51,2794.49 2610,2735 S1.10@2610,2350
  Bottom Layer w20: R11.1@560,1573.46 566.74,1580.2 566.74,1601.74 v1(595,1630) 629.17,1595.83 629.17,1579.21 630.98,1577.4 Q1.2@638.66,1577.4
  Bottom Layer w30: C19.1@2473.46,1620 C16.2@2536.85,1620
  Bottom Layer w40: C18.1@2383.46,340 2446.85,276.61 P12.1@2446.85,240 ; U9.1@2432.87,840.55 2519.45,840.55 C20.1@2530,830 2610,830 2625,845
  Bottom Layer w50: C17.2@2159.37,1230 2159.37,1300.63 2025,1435 2025,1580 2045,1600 U8.2@2140,1600 2185,1600 2310,1475 2538.43,1475 ; P12.1@2446.85,240 2625,418.15 2625,845 2625,1103.43 C15.2@2538.43,1190 2538.43,1475 ; S1.10@2610,2350 S1.9@2610,2250 S1.8@2610,2150 S1.7@2610,2050 S1.6@2610,1950 2610,1693.15 C16.2@2536.85,1620 2538.43,1618.43 2538.43,1475
  other v1: 520,1000 1445,1630 1495,1630 640,1980
GND1: 
I2C1_SCL: R6.1 U1.30 U5.1 | length 1156.5
  Top Layer w10: U1.30@1310.55,1719.84 1374.84,1719.84 1385,1730 v1(1385,1760)
  Top Layer w20: R6.1@863.46,2175 930,2175 965,2140 965,2080 945,2060 v1(925,2060) 925,1975 U5.1@864.49,1975
  GND w10: v1(925,2060) 1245,2060 1385,1920 v1(1385,1760)
I2C1_SDA: R7.1 U1.31 U5.3 | length 1098.2
  Top Layer w10: U1.31@1310.55,1700.16 1364.84,1700.16 1385,1680 v1(1385,1655)
  Top Layer w20: U5.3@864.49,2049.8 864.49,2113.98 865.51,2115 v1(925,2115)
  GND w10: v1(925,2115) 1235,2115 1425,1925 1425,1695 v1(1385,1655)
JAL0_DN: P2.3 U1.33 U2.2 | length 1606.9
  Top Layer w10: v1(1165,1675) 1179.21,1660.79 U1.33@1310.55,1660.79 ; U2.2@1200,1125.51 v1(1200,1055) 1240,1015 1240,950 1290,900 1650,900 1690,940 P2.3@1690,984.25
  Bottom Layer w10: v1(1165,1675) 1170,1675 1314,1531 1314,1344 1200,1230 v1(1200,1055)